# Altium PCB Audiodevice.PcbDoc (part 1 of 3)
Units mm, origin at the board's own origin, x right, y up, seen from the top; angles counter-clockwise.
Board outline 193.67 x 66.67 mm, 2 copper layers (Top Layer, Bottom Layer); 196 components, 164 nets, 795 pads, 323 vias.
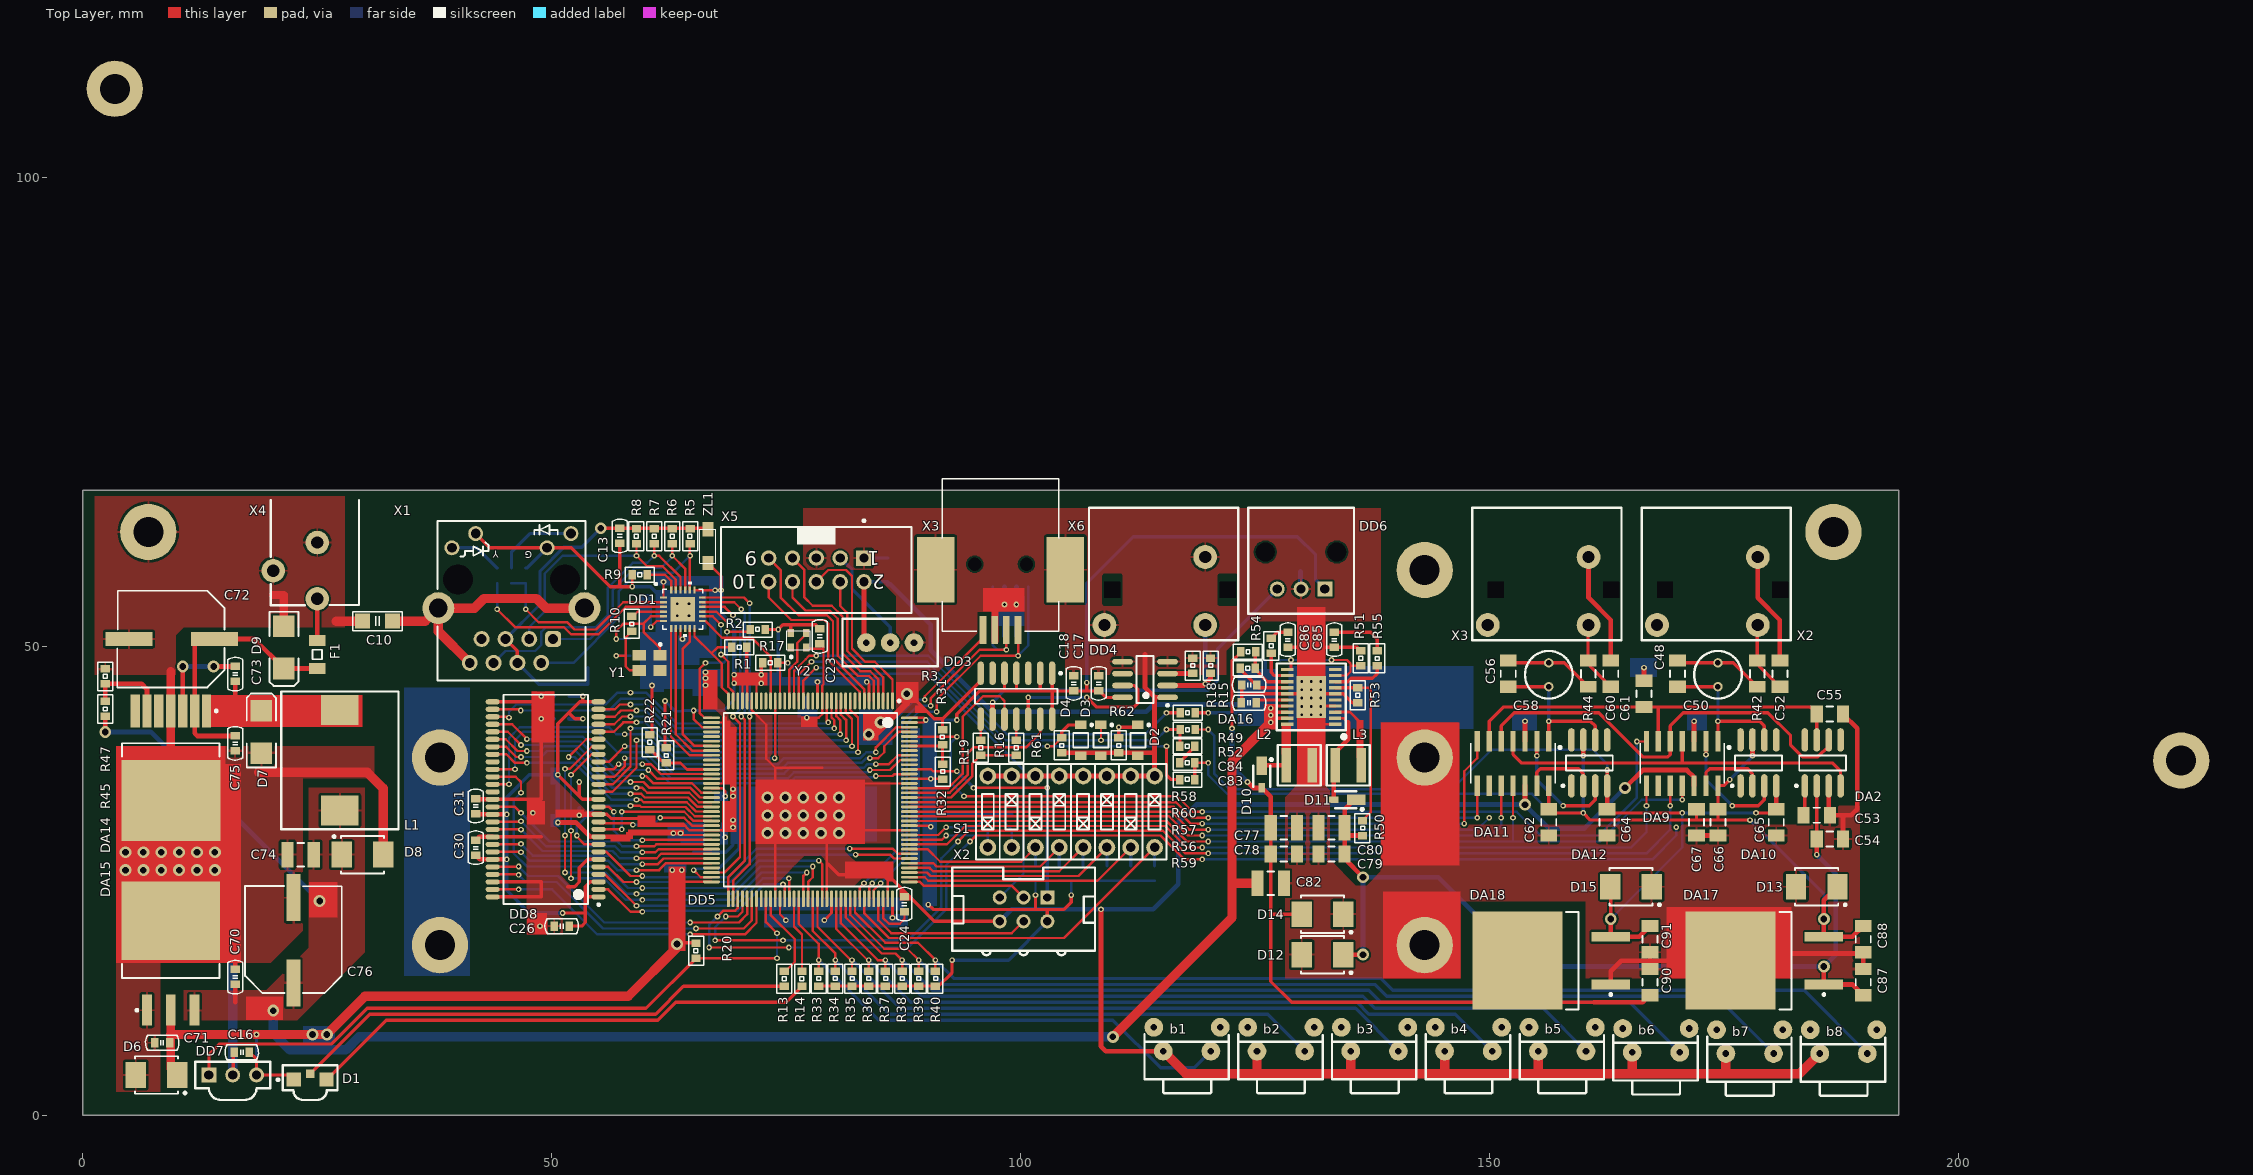
[diagram p0: Top Layer view]
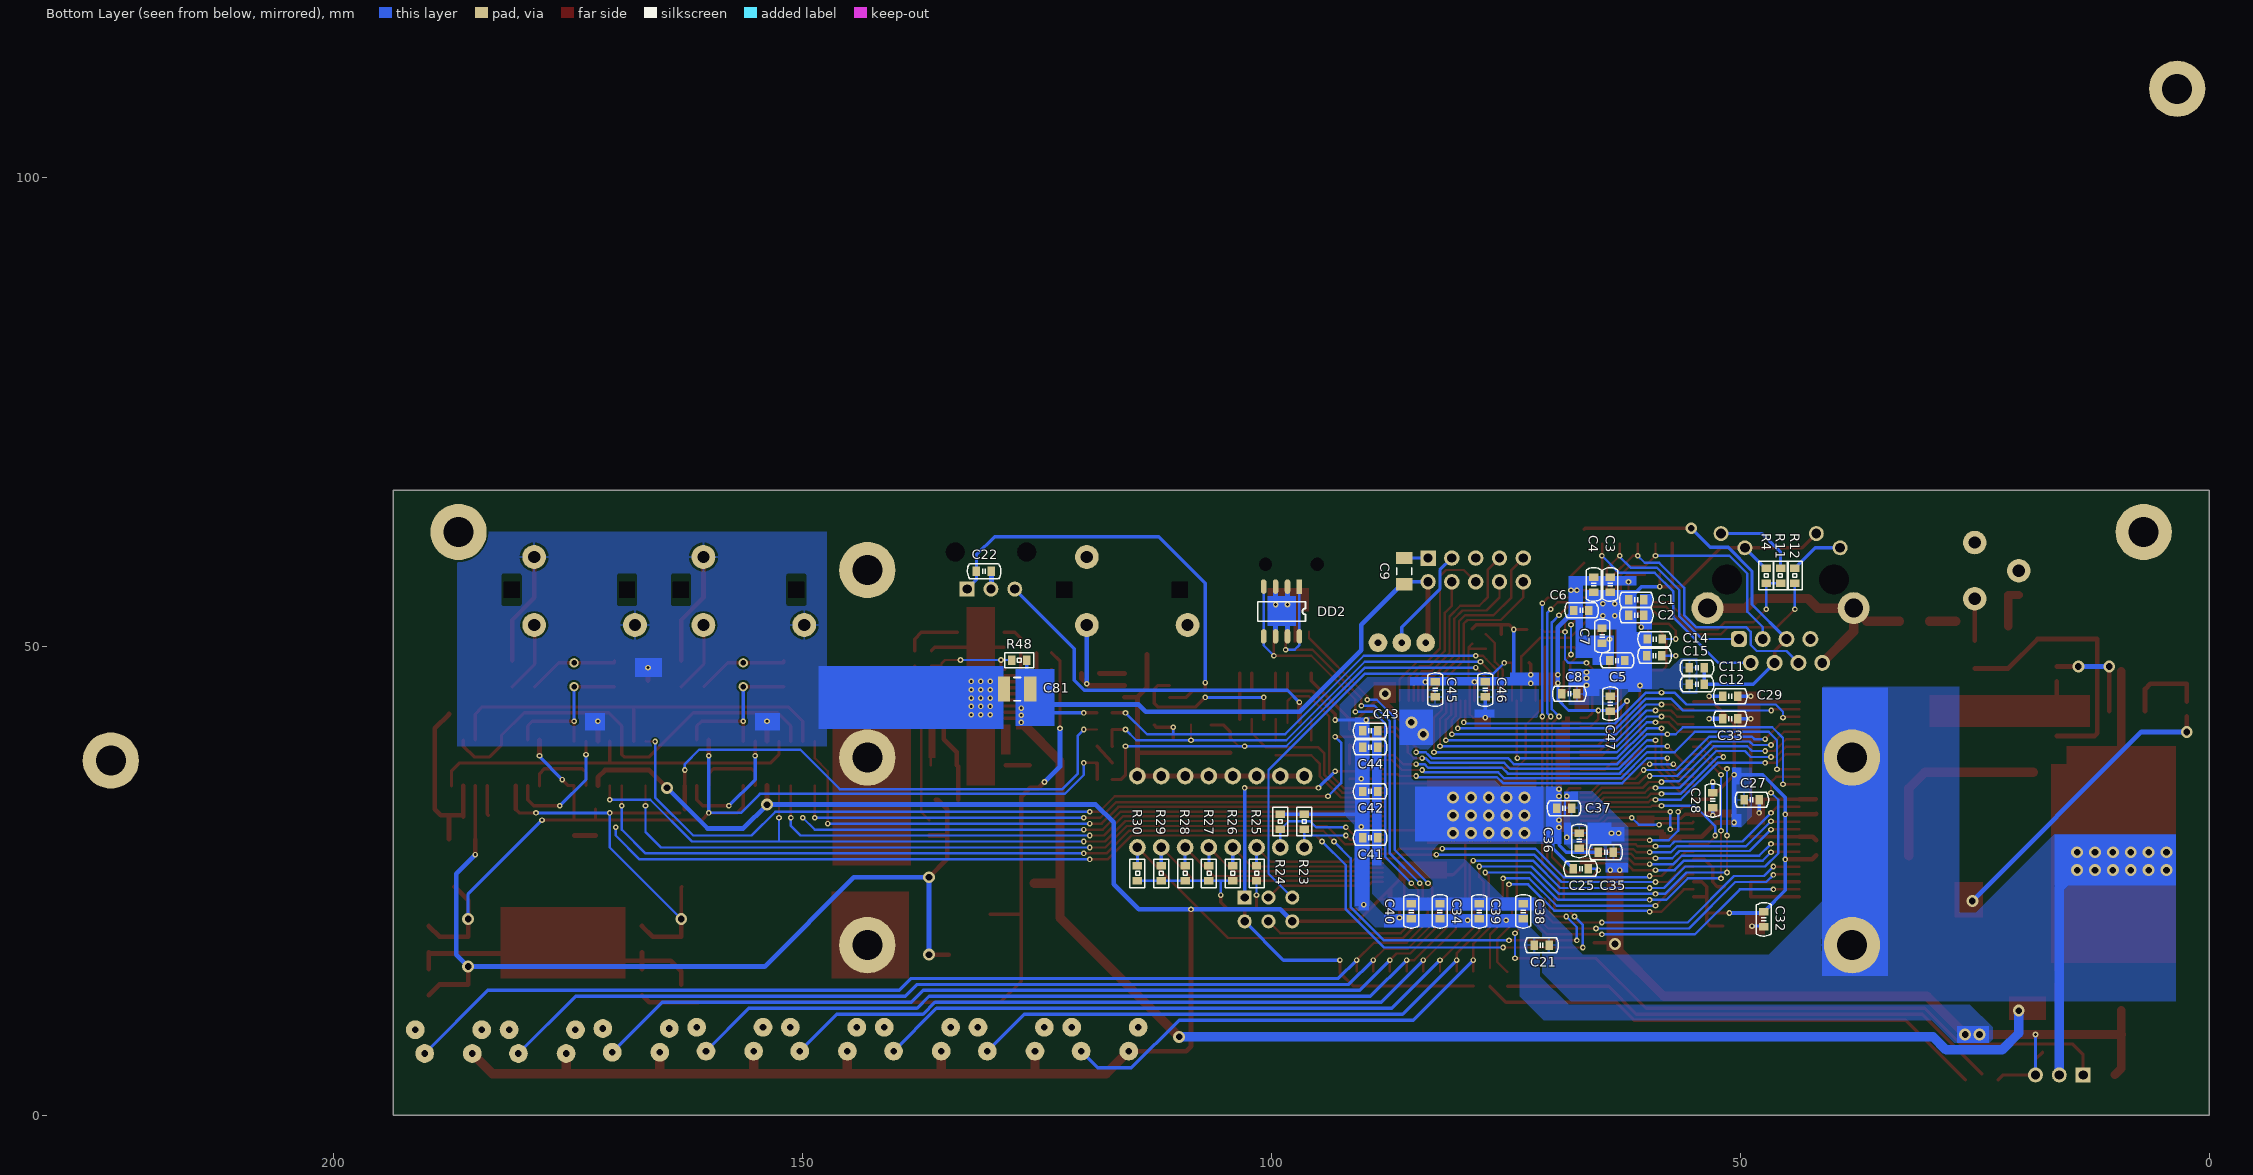
[diagram p1: Bottom Layer view, seen from below]

## Layer stack, top to bottom
Top Solder: solder mask 0.0102, Solder Resist, Dk 3.5
Top Layer: signal copper 0.0356
Dielectric 1: dielectric 0.32, FR-4, Dk 4.8
Bottom Layer: signal copper 0.0356
Bottom Solder: solder mask 0.0102, Solder Resist, Dk 3.5

## Board outline
0,0 193.675,0 193.675,66.675 0,66.675

## Design rules (kind name [scope] priority, off if disabled: settings)
Clearance [All] p1: gap=0.2 ignorepadtopadclearanceinfootprint=FALSE
HoleSize [All] p1: absolutevalues=TRUE maxlimit=4 minlimit=0.3 maxpercent=80.000 minpercent=20.000
PlaneClearance [All] p1: clearance=0.254
PolygonConnect [All] p1: connectstyle=Relief reliefconductorwidth=0.254 reliefentries=4 polygonreliefangle="90 Angle" airgapwidth=0.254
RoutingVias [All] p1: holewidth=0.3 width=0.6 viastyle="Through Hole" minholewidth=0.3 minwidth=0.6 maxholewidth=1.27 maxwidth=2.54
SolderMaskExpansion [All] p1: expansion=0.102
Width [All] p1: maxlimit=2 minlimit=0.254 preferedwidth=0.35
28 further rules are at their usual default settings.

## Classes and differential pairs
component class Power_supply: C70 C71 C72 C73 C74 C75 C76 C77 C78 C79 C80 C81 C82 C83 C84 C85 C86 C87 C88 C90 C91 D6 D7 D8 D9 D10 D11 D12 D13 D14 D15 DA14 DA15 DA16 DA17 DA18 F1 L1 L2 L3 R45 R47 R48 R49 R50 R51 R52 R53 R54 R55 R56 R57 R58 R59 R60 R61 R62 U14 U15 U17 U18 X4
component class DACs: C48 C50 C52 C53 C54 C55 C56 C58 C60 C61 C62 C64 C65 C66 C67 DA2 DA9 DA10 DA11 DA12 R42 R44 U11 X2 X3
component class Controller: b1 b2 b3 b4 b5 b6 b7 b8 C1 C2 C3 C4 C5 C6 C7 C8 C9 C10 C11 C12 C13 C14 C15 C16 C17 C18 C21 C22 C23 C24 C25 C26 C27 C28 C29 C30 C31 C32 C33 C34 C35 C36 C37 C38 C39 C40 C41 C42 C43 C44 C45 C46 C47 D1 D2 D3 D4 DD1 DD2 DD3 DD4 DD5 DD6 DD7 DD8 R1 R2 R3 R4 R5 R6 R7 R8 R9 R10 R11 R12 R13 R14 R15 R16 R17 R18 R19 R20 R21 R22 R23 R24 R25 R26 R27 R28 R29 R30 R31 R32 R33 R34 R35 R36 R37 R38 R39 R40 S1 U1B U4 X1 X2 X3 X5 X6 Y1 Y2 ZL1

## Components (designator, comment, footprint, x,y, rotation, side; value= is the part's Value field where it differs from the comment)
b1 "button" button_r 115.225,6.858 r0 top
b2 "button" button_r 125.225,6.858 r0 top
b3 "button" button_r 135.225,6.858 r0 top
b4 "button" button_r 145.225,6.858 r0 top
b5 "button" button_r 155.225,6.858 r0 top
b6 "button" button_r 165.225,6.731 r0 top
b7 "button" button_r 175.225,6.604 r0 top
b8 "button" button_r 185.225,6.604 r0 top
C1 "1uF/50V" "CAPACITOR 0603" 61.913,54.991 r180 bottom
C2 "0.01uF/50V" "CAPACITOR 0603" 61.913,53.34 r180 bottom
C3 "0.1uF/50V" "CAPACITOR 0603" 63.869,55.804 r90 bottom
C4 "0.1uF/50V" "CAPACITOR 0603" 65.647,55.804 r90 bottom
C5 "10uF/10V" "CAPACITOR 0603" 62.345,48.514 r0 bottom
C6 "0.1uF/50V" "CAPACITOR 0603" 67.755,53.848 r180 bottom
C7 "0.1uF/50V" "CAPACITOR 0603" 64.758,51.943 r270 bottom
C8 "10uF/10V" "CAPACITOR 0603" 67.437,44.958 r0 bottom
C9 "Value" C_1206 85.852,58.039 r270 bottom
C10 "1nF/2kV" "CAPACITOR 1206" 29.845,52.705 r0 top
C11 "0.1uF/50V" "CAPACITOR 0603" 55.448,47.752 r180 bottom
C12 "0.1uF/50V" "CAPACITOR 0603" 55.448,45.974 r180 bottom
C13 "0.1uF/50V" "CAPACITOR 0603" 57.277,62.611 r270 top
C14 "18pF/25V" "CAPACITOR 0603" 58.344,50.8 r0 bottom
C15 "18pF/25V" "CAPACITOR 0603" 59.974,49.022 r180 bottom
C16 "0.1uF/50V" "CAPACITOR 0603" 17.78,6.731 r180 top
C17 "0.1uF/50V" "CAPACITOR 0603" 108.331,45.263 r90 top
C18 "0.1uF/50V" "CAPACITOR 0603" 105.664,45.263 r90 top
C21 "0.1uF/50V" "CAPACITOR 0603" 72.009,18.161 r180 bottom
C22 "0.1uF/50V" "CAPACITOR 0603" 131.47,58.039 r180 bottom
C23 "0.1uF/50V" "CAPACITOR 0603" 78.613,51.892 r270 top
C24 "2.2uF/10V" "CAPACITOR 0603" 87.63,21.717 r90 top
C25 "2.2uF/10V" "CAPACITOR 0603" 66.218,26.289 r0 bottom
C26 "0.1uF/50V" "CAPACITOR 0603" 51.892,20.193 r180 top
C27 "0.1uF/50V" "CAPACITOR 0603" 49.606,33.655 r180 bottom
C28 "0.1uF/50V" "CAPACITOR 0603" 52.959,34.417 r270 bottom
C29 "0.1uF/50V" "CAPACITOR 0603" 51.892,44.704 r180 bottom
C30 "0.1uF/50V" "CAPACITOR 0603" 41.91,27.737 r90 top
C31 "0.1uF/50V" "CAPACITOR 0603" 41.91,32.182 r90 top
C32 "0.1uF/50V" "CAPACITOR 0603" 47.498,21.717 r270 bottom
C33 "0.1uF/50V" "CAPACITOR 0603" 51.892,42.291 r180 bottom
C34 "10uF/10V" "CAPACITOR 0603" 82.042,20.955 r90 bottom
C35 "0.1uF/50V" "CAPACITOR 0603" 63.551,28.067 r0 bottom
C36 "0.1uF/50V" "CAPACITOR 0603" 67.183,30.099 r270 bottom
C37 "0.1uF/50V" "CAPACITOR 0603" 67.996,32.766 r0 bottom
C38 "0.1uF/50V" "CAPACITOR 0603" 73.152,20.955 r90 bottom
C39 "0.1uF/50V" "CAPACITOR 0603" 77.851,20.955 r90 bottom
C40 "0.1uF/50V" "CAPACITOR 0603" 85.09,20.955 r90 bottom
C41 "0.1uF/50V" "CAPACITOR 0603" 90.297,29.591 r180 bottom
C42 "0.1uF/50V" "CAPACITOR 0603" 90.297,34.544 r180 bottom
C43 "0.1uF/50V" "CAPACITOR 0603" 90.297,41.021 r180 bottom
C44 "0.1uF/50V" "CAPACITOR 0603" 90.297,39.243 r180 bottom
C45 "0.1uF/50V" "CAPACITOR 0603" 82.55,46.228 r270 bottom
C46 "0.1uF/50V" "CAPACITOR 0603" 77.216,46.228 r270 bottom
C47 "0.1uF/50V" "CAPACITOR 0603" 63.881,43.104 r90 bottom
C48 "Value" C_1206 170.053,47.117 r90 top
C50 "Cap_film" Al_cap_d=5,_l_s=2.54 174.371,46.99 r90 top
C52 "Value" C_1206 180.975,47.117 r90 top
C53 "Value" C_1206 184.912,32.004 r0 top
C54 "Value" C_1206 186.309,29.464 r0 top
C55 "Value" C_1206 186.306,42.799 r0 top
C56 "Value" C_1206 152.019,47.117 r90 top
C58 "Cap_film" Al_cap_d=5,_l_s=2.54 156.337,46.99 r90 top
C60 "Value" C_1206 162.941,47.117 r90 top
C61 "Value" C_1206 166.497,44.958 r90 top
C62 "Value" C_1206 156.337,31.242 r270 top
C64 "Value" C_1206 162.56,31.242 r270 top
C65 "Value" C_1206 180.594,31.242 r270 top
C66 "Value" C_1206 174.371,31.242 r270 top
C67 "Value" C_1206 172.085,31.242 r270 top
C70 "2.2uF/50V" "CAPACITOR 0603" 16.256,15.57 r270 top
C71 "2.2uF/50V" "CAPACITOR 0603" 7.671,7.747 r0 top
C72 "220uF" CapacitorG 9.503,50.8 r0 top
C73 "0.01uF/50V" "CAPACITOR 0603" 16.256,47.879 r270 top
C74 "Value" C_1210 23.241,27.813 r0 top
C75 "0.1uF/50V" "CAPACITOR 0603" 16.256,38.862 r90 top
C76 "220uF" CapacitorG 22.479,18.669 r270 top
C77 "Value" C_1210 128.087,30.663 r180 top
C78 "Value" C_1206 128.087,27.869 r0 top
C79 "Value" C_1206 133.167,27.869 r180 top
C80 "Value" C_1210 133.167,30.663 r0 top
C81 "Value" C_1210 127.127,45.466 r180 bottom
C82 "Value" C_1210 126.687,24.765 r180 top
C83 "2.2uF/50V" "CAPACITOR 0603" 123.566,43.998 r0 top
C84 "2.2uF/50V" "CAPACITOR 0603" 125.196,45.903 r180 top
C85 "47nF/50V" "CAPACITOR 0603" 133.477,49.911 r90 top
C86 "47nF/50V" "CAPACITOR 0603" 128.524,49.911 r90 top
C87 "Value" C_1206 189.865,14.224 r90 top
C88 "Value" C_1206 189.865,18.796 r270 top
C90 "Value" C_1206 167.132,14.224 r90 top
C91 "Value" C_1206 167.132,18.796 r270 top
D1 "LED APBA3010SURKCGKC-GX" LED_RG_APBA3010SURKCGKC-GX 24.257,3.81 r180 top
D2 "MMSZ4679T1G" ONSC-SOD-123-2-425-04_V 112.522,40.005 r270 top
D3 "MMSZ4679T1G" ONSC-SOD-123-2-425-04_V 108.585,40.005 r270 top
D4 "MMSZ4679T1G" ONSC-SOD-123-2-425-04_V 106.426,40.005 r270 top
D6 "SMLVT3V3" ONSC-SMB-2-403A-03_H_V 7.874,4.318 r180 top
D7 "10BQ060" SMB 19.05,40.894 r90 top
D8 "SMBJ5.0CA-13-F" ONSC-SMB-2-403A-03_H_V 29.845,27.813 r0 top
D9 "10BQ060" SMB 21.463,49.911 r270 top
D10 "DFLS240" "PowerDI™ 123" 125.73,36.449 r90 top
D11 "DFLS240" "PowerDI™ 123" 134.945,33.66 r0 top
D12 "SMBJ12CA-13-F" ONSC-SMB-2-403A-03_H_V 132.207,17.145 r180 top
D13 "SMBJ5.0CA-13-F" ONSC-SMB-2-403A-03_H_V 184.909,24.384 r180 top
D14 "SMBJ12CA-13-F" ONSC-SMB-2-403A-03_H_V 132.207,21.463 r180 top
D15 "SMBJ5.0CA-13-F" ONSC-SMB-2-403A-03_H_V 165.1,24.384 r180 top
DA2 "MAX6126" ADI-R-8_M 185.547,37.592 r90 top
DA9 "MAX5719" D14 170.561,37.541 r270 top
DA10 "OPA1611AID" TI-D8_M 178.689,37.592 r90 top
DA11 "MAX5719" D14 152.527,37.541 r270 top
DA12 "OPA1611AID" TI-D8_M 160.655,37.592 r90 top
DA14 "LM2676SX-ADJ" TS7B_M 9.398,37.084 r270 top
DA15 "LM1117SX-3.3" TS3B_N 9.398,17.272 r90 top
DA16 "ADP5071AREZ" 20-TSSOP_exposed_pad 131.008,44.633 r180 top
DA17 "L7805ABD2T-TR" TO-263_M 179.324,16.51 r180 top
DA18 "L7905CD2T-TR" TO-263_M 156.591,16.51 r180 top
DD1 "Part Number: LAN8720A-CP-TR" QFN24-6X6_MC-M 63.996,53.975 r0 top value=Value
DD2 "LC03-3.3" SOIC-8 97.028,56.388 r270 bottom
DD3 "MC74VHC126D" 751A-03_M 99.568,44.704 r270 top
DD4 "DS90LV028ATM" M08A_N 113.284,46.482 r180 top
DD5 "STM32H743" STM-LQFP144_N 77.606,33.651 r270 top
DD6 "PLR135-T" PLR135-T 129.921,56.134 r0 top
DD7 "TSOP38538" TSOP38538 16.002,4.318 r0 top
DD8 "MT48LC4M16A2P-6 IT OR IS42S16400J" MICT-P-54_N 49.366,33.706 r180 top
F1 "Fuse" R_1206#1 25.019,49.149 r270 top
L1 "SRP1265A-330MCT-ND" Inductor_RLF12545 27.432,43.212 r270 top
L2 "Wurth 74438357068" Wurth74438357068 129.738,37.343 r180 top
L3 "Wurth 74438357068" Wurth74438357068 134.945,37.343 r0 top
R1 "1K5" "Resistor 0603" 69.215,49.911 r0 top
R2 "10K" "Resistor 0603" 71.171,51.816 r0 top
R3 "10K" r3296 88.646,50.419 r90 top
R4 "10K" "Resistor 0603" 47.244,56.769 r90 bottom
R5 "49R9 1%" "Resistor 0603" 64.77,60.96 r90 top
R6 "49R9 1%" "Resistor 0603" 62.865,60.96 r90 top
R7 "49R9 1%" "Resistor 0603" 60.96,60.96 r90 top
R8 "49R9 1%" "Resistor 0603" 59.055,60.96 r90 top
R9 "12K1 1%" "Resistor 0603" 58.598,57.658 r0 top
R10 "499R" "Resistor 0603" 58.547,51.613 r90 top
R11 "270R" "Resistor 0603" 45.72,56.769 r90 bottom
R12 "270R" "Resistor 0603" 44.196,56.769 r90 bottom
R13 "330" "Resistor 0603" 74.803,13.767 r90 top
R14 "330" "Resistor 0603" 76.708,13.767 r90 top
R15 "75" "Resistor 0603" 120.269,48.768 r270 top
R16 "330" "Resistor 0603" 99.568,38.405 r90 top
R17 "10K" "Resistor 0603" 74.117,48.26 r180 top
R18 "75" "Resistor 0603" 118.364,48.768 r270 top
R19 "330" "Resistor 0603" 95.758,38.405 r90 top
R20 "4.7K" "Resistor 0603" 65.405,16.764 r90 top
R21 "4.7K" "Resistor 0603" 62.23,37.592 r90 top
R22 "4.7K" "Resistor 0603" 60.452,40.589 r270 top
R23 "4.7K" "Resistor 0603" 96.52,30.531 r90 bottom
R24 "4.7K" "Resistor 0603" 99.06,30.531 r90 bottom
R25 "4.7K" "Resistor 0603" 101.6,26.619 r270 bottom
R26 "4.7K" "Resistor 0603" 104.14,26.619 r270 bottom
R27 "4.7K" "Resistor 0603" 106.68,26.619 r270 bottom
R28 "4.7K" "Resistor 0603" 109.22,26.619 r270 bottom
R29 "4.7K" "Resistor 0603" 111.76,26.619 r270 bottom
R30 "4.7K" "Resistor 0603" 114.3,26.619 r270 bottom
R31 "4.7K" "Resistor 0603" 91.694,39.548 r90 top
R32 "4.7K" "Resistor 0603" 91.694,37.465 r270 top
R33 "4.7K" "Resistor 0603" 78.486,15.392 r270 top
R34 "4.7K" "Resistor 0603" 80.264,15.392 r270 top
R35 "4.7K" "Resistor 0603" 82.042,15.392 r270 top
R36 "4.7K" "Resistor 0603" 83.82,15.392 r270 top
R37 "4.7K" "Resistor 0603" 85.598,15.392 r270 top
R38 "4.7K" "Resistor 0603" 87.376,15.392 r270 top
R39 "4.7K" "Resistor 0603" 89.154,15.392 r270 top
R40 "4.7K" "Resistor 0603" 90.932,15.392 r270 top
R42 "Value" R_1206#2 178.562,47.117 r90 top
R44 "Value" R_1206#2 160.528,47.117 r90 top
R45 "4.7K" "Resistor 0603" 2.413,44.145 r270 top
R47 "1K5" "Resistor 0603" 2.413,47.625 r270 top
R48 "5K6" "Resistor 0603" 127.706,48.519 r180 bottom
R49 "11K" "Resistor 0603" 125.064,49.459 r180 top
R50 "10K" "Resistor 0603" 136.469,31.45 r270 top
R51 "2K" "Resistor 0603" 136.271,49.555 r270 top
R52 "1K" "Resistor 0603" 123.439,47.681 r0 top
R53 "1K1" "Resistor 0603" 135.961,43.998 r90 top
R54 "11K" "Resistor 0603" 126.746,50.876 r270 top
R55 "5K6" "Resistor 0603" 138.049,47.93 r90 top
R56 "1.5K 0.1%" "Resistor 0603" 116.993,37.592 r0 top
R57 "1.5K 0.1%" "Resistor 0603" 116.993,39.37 r0 top
R58 "4.7K" "Resistor 0603" 117.018,42.926 r0 top
R59 "4.7K" "Resistor 0603" 116.993,35.814 r0 top
R60 "4.7K" "Resistor 0603" 118.618,41.148 r180 top
R61 "1.5K 0.1%" "Resistor 0603" 104.394,38.659 r90 top
R62 "1.5K 0.1%" "Resistor 0603" 110.49,38.659 r90 top
S1 "SW-DIP16" SW-DIP16 96.52,28.575 r0 top
X1 "J00-0065NL" J00-0065NL 53.51,54.1 r270 top
X2 "PJRAS1X1S01X" RCA_connector 174.879,58.547 r180 top
X2 "Header 3x2" idc6 102.87,23.241 r270 top
X3 "PJRAS1X1S01X" RCA_connector 156.829,58.547 r180 top
X3 "1734346-1" CONN_1-1734346-1 97.879,55.27 r0 top value=Value
X4 "PJ102a" Conn_pj-102a 25.019,55.087 r0 top
X5 "16*2 LCD OR SPI_4" BH-10 78.232,58.166 r180 top
X6 "PJRAS1X1S01X" RCA_connector 115.951,58.547 r180 top
Y1 "ABM8-25.000MHZ-B2-T" CFPX-5 60.452,48.26 r180 top
Y2 "KC2520B16.3840C1GE00" "Clock Oscillator ASDMB" 76.327,50.673 r0 top
ZL1 "BLM31PG121SN1L" BLM31 66.675,60.706 r90 top

## Footprints (in the part's own frame and the unit in brackets; to place one, negate y for a bottom-side part, rotate by r counter-clockwise, add the part's x,y. Pads: shape width x height; smd on the part's side, far side on the other; paste and mask are expansions set on the pad)
20-TSSOP_exposed_pad [mm]
  rect 1.3x0.35 smd: 1(-2.55,2.925) 2(-2.54,2.275) 3(-2.55,1.625) 4(-2.55,0.975) 5(-2.55,0.325) 6(-2.55,-0.325) 7(-2.55,-0.975) 8(-2.55,-1.625) 9(-2.55,-2.275) 10(-2.55,-2.925) 11(2.55,-2.925) 12(2.55,-2.275) 13(2.55,-1.625) 14(2.55,-0.975) 15(2.55,-0.325) 16(2.565,0.325) 17(2.565,0.975) 18(2.565,1.625) 19(2.565,2.275) 20(2.565,2.925)
  rect 3.1x4.5 smd: 21(0,0)
  silkscreen extent -3.68,-3.56 3.68,4.44
751A-03_M [mm] "SOIC, 14-Leads, Body 8.7x3.9mm, Pitch 1.27mm, IPC Low Density"
  oval 2.5x0.7 smd: 1(-2.45,3.81) 2(-2.45,2.54) 3(-2.45,1.27) 4(-2.45,0) 5(-2.45,-1.27) 6(-2.45,-2.54) 7(-2.45,-3.81) 8(2.45,-3.81) 9(2.45,-2.54) 10(2.45,-1.27) 11(2.45,0) 12(2.45,1.27) 13(2.45,2.54) 14(2.45,3.81)
  silkscreen extent -2.57,-4.4 0.8,4.84, body extent -2,-4.38 2,4.38, height 1.75
ADI-R-8_M [mm] "SOIC, 8-Leads, Body 4.9x3.9mm, Pitch 1.27mm, IPC Low Density"
  oval 2.5x0.7 smd: 1(-2.45,1.905) 2(-2.45,0.635) 3(-2.45,-0.635) 4(-2.45,-1.905) 5(2.45,-1.905) 6(2.45,-0.635) 7(2.45,0.635) 8(2.45,1.905)
  silkscreen extent -2.57,-2.5 0.8,2.93, body extent -2,-2.5 2,2.5, height 1.75
Al_cap_d=5,_l_s=2.54 [mm]
  round 1 hole 0.6: 1(-1.27,0) 2(1.27,0)
  silkscreen extent -2.54,-2.54 2.54,2.54
BH-10 [mm] "Connector; IDC, Low Profile Male Header, Thru-Hole; 10 Position; Vertical; Pitch 2.54 mm; Body 20.32 x 9.2 x 9.45 mm (LxWxH)"
  rect 1.65x1.65 hole 1: 1(-5.08,-1.27)
  round 1.65 hole 1: 2(-5.08,1.27) 3(-2.54,-1.27) 4(-2.54,1.27) 5(0,-1.27) 6(0,1.27) 7(2.54,-1.27) 8(2.54,1.27) 9(5.08,-1.27) 10(5.08,1.27)
  silkscreen extent -10.16,-5.37 10.16,4.6
BLM31 [mm]
  rect 1.5x1.2 smd: 1(-1.8,0) 2(1.8,0)
  silkscreen extent -1.8,-0.85 1.8,0.85
button_r [mm] "Pushbutton frontal"
  round 2 hole 0.7: 1(0,0) 2(5.08,0) 3(-1,2.54) 4(6.08,2.54)
  silkscreen extent -2,-4.5 7,1.8
C_1206 [mm] "C_1206"
  rect 1.3x1.8 smd: 1(-1.4,0) 2(1.4,0)
  silkscreen extent -0.35,-0.8 0.35,0.8, body extent -1.6,-0.8 1.6,0.8, height 0.78
C_1210 [mm] "C_1210"
  rect 1.3x2.7 smd: 1(-1.4,0) 2(1.4,0)
  silkscreen extent -0.35,-1.25 0.35,1.25, body extent -1.6,-1.25 1.6,1.25, height 0.78
"CAPACITOR 0603" [mm]
  rect 0.8x1 smd: 1(0,0) 2(1.6,0)
  silkscreen extent -0.97,-0.8 2.6,0.8, body extent -0.01,-0.38 1.64,0.42, height 0.81
"CAPACITOR 1206" [mm]
  rect 1.6x1.6 smd: 1(0,0) 2(3.2,0)
  silkscreen extent -1.02,-1.02 4.23,1.02, body extent 0.01,-0.8 3.22,0.8, height 1.26
CapacitorG [mm] "Aluminium cap, smt, d10mm"
  rect 5x1.5 smd: 1(-4.55,0) 2(4.55,0)
  silkscreen extent -5.82,-5.15 5.61,5.15, body extent -5.73,-5.07 5.58,5.23, height 10.8
CFPX-5 [mm] "Surface Mount Quartz Crystal; Body 3.4 x 2.7 mm (LxW max)"
  rect 1.4x1.15 smd: 1(-1.1,-0.8) 2(1.1,-0.8) 3(1.1,0.8) 4(-1.1,0.8)
  silkscreen extent -1.27,-2.09 -1.03,-1.84
"Clock Oscillator ASDMB" [mm] "Clock Oscillator ASDMB 2.5x2.0"
  rect 0.7x0.85 smd mask+0.051: 1(-0.825,-0.775) 2(0.825,-0.775) 3(0.825,0.775) 4(-0.825,0.775)
  silkscreen extent -1.25,-1 1.25,1
CONN_1-1734346-1 [mil]
  rect 28x118 smd: 1(-73.5,-138) 2(24.5,-138) 3(73.5,-138) 4(-24.5,-138)
  rect 157.48x275.59 smd: 5(-272.5,115) 6(272.5,115)
  round 0 hole 55.12 unplated: 7(-108.5,138) 8(108.5,138)
  silkscreen extent -244,-143 244,497, body extent -326,-180 324,494, height 445
Conn_pj-102a [mm] "Cui inc, PJ-102A Barell jack"
  round 2.5 hole 1.3: 1(0,0) 2(0,6) 3(-4.7,3)
  silkscreen extent -4.95,-0.69 4.44,10.54, body extent -4.95,-0.69 4.45,13.71, height 11.01
D14 [mil]
  rect 86x22 smd paste+0 mask+0: 1(-93,150) 2(-93,100) 3(-93,50) 4(-93,0) 5(-93,-50) 6(-93,-100) 7(-93,-150) 8(93,-150) 9(93,-100) 10(93,-50) 11(93,0) 12(93,50) 13(93,100) 14(93,150)
  silkscreen extent -84,-177 84,203, body extent -122,-172 122,172, height 69
idc6 [mm]
  rect 1.5x1.5 hole 0.9: 1(0,0)
  round 1.5 hole 0.9: 2(2.54,0) 3(0,-2.54) 4(2.54,-2.54) 5(0,-5.08) 6(2.54,-5.08)
  silkscreen extent -3.2,-10.16 6.15,5.08, body extent -3.18,-10.16 6.27,5.08, height 9.11
Inductor_RLF12545 [mm]
  rect 3.2x4 smd: 1(0,0) 2(10.7,0)
  silkscreen extent -2,-6.25 12.7,6.25
J00-0065NL [mm]
  rrect50% 1.7x1.7 hole 1.05: 1(3.3,-3.345)
  round 1.7 hole 1.05: 2(5.84,-4.615) 3(3.3,-5.885) 4(5.84,-7.155) 5(3.3,-8.425) 6(5.84,-9.695) 7(3.3,-10.965) 8(5.84,-12.235)
  round 1.6 hole 1.05: 9(-7.95,-1.44) 10(-6.43,-3.98) 11(-7.95,-11.6) 12(-6.43,-14.14)
  round 3.4 hole 2: 13(0,0) 14(0,-15.58)
  round 2.95 hole 3.2: MH3(-3.05,-2.075) MH4(-3.05,-13.505)
  silkscreen extent -9.3,-15.68 7.71,0.09, body extent -13.76,-18.49 7.82,2.89, height 15.75
LED_RG_APBA3010SURKCGKC-GX [mm]
  rect 1.5x1.5 smd: 1(1.75,0) 3(-1.75,0)
  rect 0.9x0.9 smd: 2(0,-0.65)
  silkscreen extent -2.92,-1.52 3.56,2.16
M08A_N [mm] "SOIC, 8-Leads, Body 4.9x3.9mm, Pitch 1.27mm, IPC Medium Density"
  oval 2.2x0.6 smd: 1(-2.4,1.905) 2(-2.4,0.635) 3(-2.4,-0.635) 4(-2.4,-1.905) 5(2.4,-1.905) 6(2.4,-0.635) 7(2.4,0.635) 8(2.4,1.905)
  silkscreen extent -2.53,-2.5 0.9,2.88, body extent -2,-2.5 2,2.5, height 1.75
MICT-P-54_N [mm] "SOP, 54-Leads, Body 22.3x10.2mm, Pitch 0.8mm, IPC Medium Density"
  oval 1.5x0.55 smd: 1(-5.65,10.4) 2(-5.65,9.6) 3(-5.65,8.8) 4(-5.65,8) 5(-5.65,7.2) 6(-5.65,6.4) 7(-5.65,5.6) 8(-5.65,4.8) 9(-5.65,4) 10(-5.65,3.2) 11(-5.65,2.4) 12(-5.65,1.6) 13(-5.65,0.8) 14(-5.65,0) 15(-5.65,-0.8) 16(-5.65,-1.6) 17(-5.65,-2.4) 18(-5.65,-3.2) 19(-5.65,-4) 20(-5.65,-4.8) 21(-5.65,-5.6) 22(-5.65,-6.4) 23(-5.65,-7.2) 24(-5.65,-8) 25(-5.65,-8.8) 26(-5.65,-9.6) 27(-5.65,-10.4) 28(5.65,-10.4) 29(5.65,-9.6) 30(5.65,-8.8) 31(5.65,-8) 32(5.65,-7.2) 33(5.65,-6.4) 34(5.65,-5.6) 35(5.65,-4.8) 36(5.65,-4) 37(5.65,-3.2) 38(5.65,-2.4) 39(5.65,-1.6) 40(5.65,-0.8) 41(5.65,0) 42(5.65,0.8) 43(5.65,1.6) 44(5.65,2.4) 45(5.65,3.2) 46(5.65,4) 47(5.65,4.8) 48(5.65,5.6) 49(5.65,6.4) 50(5.65,7.2) 51(5.65,8) 52(5.65,8.8) 53(5.65,9.6) 54(5.65,10.4)
  silkscreen extent -5.77,-11.15 4.5,11.35, body extent -5.1,-11.15 5.1,11.15, height 1.2
ONSC-SMB-2-403A-03_H_V [mm] "Molded, 2-Leads, Body 4.6x3.95mm"
  rect 2.159x2.743 smd: 1(-2.21,0) 2(2.21,0)
  silkscreen extent -3.16,-2 2.3,2.05, body extent -2.3,-1.97 2.3,1.97, height 2.42
ONSC-SOD-123-2-425-04_V [mm] "SOD, 2-Leads, Body 2.69x1.6mm"
  rect 0.91x1.22 smd: 1(-1.635,0) 2(1.635,0)
  silkscreen extent -1.76,-0.8 0.78,1.29, body extent -1.35,-0.8 1.35,0.8, height 1.35
PLR135-T [mm]
  rect 1.6x1.6 hole 1: 1(2.54,0)
  round 1.6 hole 1: 2(0,0) 3(-2.54,0)
  round 1.6 hole 2 slot 2.01 at 0 deg unplated: Mount(-3.81,3.95) Mount(3.81,3.95)
  silkscreen extent -5.65,-2.65 5.65,8.65
"PowerDI™ 123" [mm]
  rect 1x0.65 smd: 1(-1.525,0)
  rect 2x1.1 smd: 2(0.85,0)
  silkscreen extent -1.4,-1.16 1.64,0.89
QFN24-6X6_MC-M [mil]
  rect 28x10 smd paste+0 mask+0: 1(-81,49.21) 2(-81,29.53) 3(-81,9.84) 4(-81,-9.84) 5(-81,-29.53) 6(-81,-49.21) 13(81,-49.21) 14(81,-29.53) 15(81,-9.84) 16(81,9.84) 17(81,29.53) 18(81,49.21)
  rect 10x28 smd paste+0 mask+0: 7(-49.21,-81) 8(-29.53,-81) 9(-9.84,-81) 10(9.84,-81) 11(29.53,-81) 12(49.21,-81) 19(49.21,81) 20(29.53,81) 21(9.84,81) 22(-9.84,81) 23(-29.53,81) 24(-49.21,81)
  rect 102x102 smd paste-50.5 mask+0: 25(0,0)
  silkscreen extent -117,-115 84,115
r3296 [mm]
  round 2 hole 0.7: 1(0,0) 2(0,2.54) 3(0,5.08)
  silkscreen extent -2.54,-2.54 2.54,7.62
R_1206#1 [mm]
  rect 1.15x1.8 smd: 1(-1.5,0) 2(1.5,0)
  silkscreen extent -0.51,-0.51 0.51,0.51, body extent -1.6,-0.8 1.6,0.8, height 1
R_1206#2 [mm] "R_1206"
  rect 1.25x1.75 smd: 1(-1.4,0) 2(1.4,0)
  silkscreen extent -0.4,-0.77 0.4,0.77, body extent -1.6,-0.8 1.6,0.8, height 0.6
RCA_connector [mm]
  round 2.54 hole 1.3: 1(-3.75,6.25) 2(-3.75,-1) 3(7,6.25)
  rect 0x0 hole 1.7 square: ""(-6.15,2.5) ""(6.15,2.5)
  silkscreen extent -7.26,-6.25 8.64,7.87
"Resistor 0603" [mm]
  rect 0.8x1 smd: 1(0,0) 2(1.6,0)
  silkscreen extent -0.72,-0.8 2.35,0.8, body extent -0.03,-0.45 1.63,0.45, height 0.46
SMB [mm] "DO-214-AA/SMB; 2 C-Bend Leads; Body 5.3 x 3.6 mm, inc. leads (LxW)"
  rect 2.3x2.3 smd: 1(-2.25,0) 2(2.25,0)
  silkscreen extent -3.8,-1.55 4.1,1.55
SOIC-8 [mm]
  rect 1.55x0.6 smd: 1(0,0)
  oval 1.55x0.6 smd: 2(0,-1.27) 3(0,-2.54) 4(0,-3.81) 5(5.3,-3.81) 6(5.3,-2.54) 7(5.3,-1.27) 8(5.3,0)
  silkscreen extent 1.61,-4.44 3.69,0.63
STM-LQFP144_N [mm] "Thin QFP, 144-Leads, Body 20x20mm, Pitch 0.5mm, IPC Medium Density"
  oval 1.8x0.3 smd: 1(-10.55,8.75) 2(-10.55,8.25) 3(-10.55,7.75) 4(-10.55,7.25) 5(-10.55,6.75) 6(-10.55,6.25) 7(-10.55,5.75) 8(-10.55,5.25) 9(-10.55,4.75) 10(-10.55,4.25) 11(-10.55,3.75) 12(-10.55,3.25) 13(-10.55,2.75) 14(-10.55,2.25) 15(-10.55,1.75) 16(-10.55,1.25) 17(-10.55,0.75) 18(-10.55,0.25) 19(-10.55,-0.25) 20(-10.55,-0.75) 21(-10.55,-1.25) 22(-10.55,-1.75) 23(-10.55,-2.25) 24(-10.55,-2.75) 25(-10.55,-3.25) 26(-10.55,-3.75) 27(-10.55,-4.25) 28(-10.55,-4.75) 29(-10.55,-5.25) 30(-10.55,-5.75) 31(-10.55,-6.25) 32(-10.55,-6.75) 33(-10.55,-7.25) 34(-10.55,-7.75) 35(-10.55,-8.25) 36(-10.55,-8.75) 73(10.55,-8.75) 74(10.55,-8.25) 75(10.55,-7.75) 76(10.55,-7.25) 77(10.55,-6.75) 78(10.55,-6.25) 79(10.55,-5.75) 80(10.55,-5.25) 81(10.55,-4.75) 82(10.55,-4.25) 83(10.55,-3.75) 84(10.55,-3.25) 85(10.55,-2.75) 86(10.55,-2.25) 87(10.55,-1.75) 88(10.55,-1.25) 89(10.55,-0.75) 90(10.55,-0.25) 91(10.55,0.25) 92(10.55,0.75) 93(10.55,1.25) 94(10.55,1.75) 95(10.55,2.25) 96(10.55,2.75) 97(10.55,3.25) 98(10.55,3.75) 99(10.55,4.25) 100(10.55,4.75) 101(10.55,5.25) 102(10.55,5.75) 103(10.55,6.25) 104(10.55,6.75) 105(10.55,7.25) 106(10.55,7.75) 107(10.55,8.25) 108(10.55,8.75)
  oval 0.3x1.8 smd: 37(-8.75,-10.55) 38(-8.25,-10.55) 39(-7.75,-10.55) 40(-7.25,-10.55) 41(-6.75,-10.55) 42(-6.25,-10.55) 43(-5.75,-10.55) 44(-5.25,-10.55) 45(-4.75,-10.55) 46(-4.25,-10.55) 47(-3.75,-10.55) 48(-3.25,-10.55) 49(-2.75,-10.55) 50(-2.25,-10.55) 51(-1.75,-10.55) 52(-1.25,-10.55) 53(-0.75,-10.55) 54(-0.25,-10.55) 55(0.25,-10.55) 56(0.75,-10.55) 57(1.25,-10.55) 58(1.75,-10.55) 59(2.25,-10.55) 60(2.75,-10.55) 61(3.25,-10.55) 62(3.75,-10.55) 63(4.25,-10.55) 64(4.75,-10.55) 65(5.25,-10.55) 66(5.75,-10.55) 67(6.25,-10.55) 68(6.75,-10.55) 69(7.25,-10.55) 70(7.75,-10.55) 71(8.25,-10.55) 72(8.75,-10.55) 109(8.75,10.55) 110(8.25,10.55) 111(7.75,10.55) 112(7.25,10.55) 113(6.75,10.55) 114(6.25,10.55) 115(5.75,10.55) 116(5.25,10.55) 117(4.75,10.55) 118(4.25,10.55) 119(3.75,10.55) 120(3.25,10.55) 121(2.75,10.55) 122(2.25,10.55) 123(1.75,10.55) 124(1.25,10.55) 125(0.75,10.55) 126(0.25,10.55) 127(-0.25,10.55) 128(-0.75,10.55) 129(-1.25,10.55) 130(-1.75,10.55) 131(-2.25,10.55) 132(-2.75,10.55) 133(-3.25,10.55) 134(-3.75,10.55) 135(-4.25,10.55) 136(-4.75,10.55) 137(-5.25,10.55) 138(-5.75,10.55) 139(-6.25,10.55) 140(-6.75,10.55) 141(-7.25,10.55) 142(-7.75,10.55) 143(-8.25,10.55) 144(-8.75,10.55)
  silkscreen extent -10.67,-9.25 9.25,9.58, body extent -10,-10 10,10, height 1.6
SW-DIP16 [mil]
  round 70 hole 40: 1(0,0) 2(100,0) 3(200,0) 4(300,0) 5(400,0) 6(500,0) 7(600,0) 8(700,0) 9(700,300) 10(600,300) 11(500,300) 12(400,300) 13(300,300) 14(200,300) 15(100,300) 16(0,300)
  silkscreen extent -50,-50 750,350, body extent -50,-50 750,350, height 250
TI-D8_M [mm] "SOIC, 8-Leads, Body 4.9x3.9mm, Pitch 1.27mm, IPC Low Density"
  oval 2.5x0.7 smd: 1(-2.45,1.905) 2(-2.45,0.635) 3(-2.45,-0.635) 4(-2.45,-1.905) 5(2.45,-1.905) 6(2.45,-0.635) 7(2.45,0.635) 8(2.45,1.905)
  silkscreen extent -2.57,-2.5 0.8,2.93, body extent -2,-2.5 2,2.5, height 1.75
TO-263_M [mm] "D2-PAK, 4-Leads, Body 9.2x10.2mm, Pitch 2.54mm, Lead Span 15.4mm, IPC Low Density"
  rect 4.1x1.05 smd: 1(-6.35,2.54) 3(-6.35,-2.54)
  rect 9.6x10.45 smd: 4(3.6,0)
  silkscreen extent -6.48,-5.2 -1.6,5.2, body extent -2.9,-5.2 6.45,5.2, height 4.6
TS3B_N [mm] "D2-PAK, 4-Leads, Body 8.6x10.2mm, Pitch 2.54mm, Lead Span 14.2mm, IPC Medium Density"
  rect 3.3x1.05 smd: 1(-6.05,2.54) 2(-6.05,0) 3(-6.05,-2.54)
  rect 8.4x10.5 smd: 4(3.5,0)
  silkscreen extent -6.17,-5.2 -1.1,5.2, body extent -2.6,-5.2 6.29,5.2, height 4.64
TS7B_M [mm] "D2-PAK, 8-Leads, Body 8.6x10.2mm, Pitch 1.27mm, Lead Span 14.1mm, IPC Low Density"
  rect 3.5x1 smd: 1(-6.05,3.81) 2(-6.05,2.54) 3(-6.05,1.27) 4(-6.05,0) 5(-6.05,-1.27) 6(-6.05,-2.54) 7(-6.05,-3.81)
  rect 8.6x10.55 smd: 8(3.5,0)
  silkscreen extent -6.17,-5.2 -1.2,5.2, body extent -2.6,-5.2 6.29,5.2, height 4.64
TSOP38538 [mm]
  rect 1.6x1.6 hole 1: 1(-2.54,0)
  round 1.6 hole 1: 2(0,0) 3(2.54,0)
  silkscreen extent -4,-2.67 4,1.4
Wurth74438357068 [mm]
  rect 1x3.7 smd: 1(-1.39,0) 2(1.39,0)
  silkscreen extent -2.29,-2.16 2.29,2.16

## Part data
b1 b2 b3 b4 b5 b6 b7 b8: library part Pushbutton, Manufacturer_Part_Number="Wurth 431256083726"
C1: library part Capasitor, Manufacturer_Part_Number=CGB3B1X7R1A105K055AC
C2: library part Capasitor, Manufacturer_Part_Number=CC0603KRX7R9BB103
C3 C4 C6 C7 C11 C12 C13 C16 C17 C18 C21 C22 C23 C26 C27 C28 C29 C30 C31 C32 C33 C35 C36 C37 C38 C39 C40 C41 C42 C43 C44 C45 C46 C47: library part Capasitor, Manufacturer_Part_Number=CC0603KRX7R9BB104
C5 C8 C34: library part Capasitor, Manufacturer_Part_Number=GRM188R61A106ME69D
C9: library part C_SMD_ceramic, "Capacitor", Capacitance=0.1uF, Voltage=50V
C10: library part Capasitor, Manufacturer_Part_Number=C1206C102KGRACTU
C14 C15: library part Capasitor, Manufacturer_Part_Number=C0603C180D5GACTU
C24 C25: library part Capasitor, Manufacturer_Part_Number=C1608X7R1A225M080AC
C48 C52 C56 C60: library part C_SMD_ceramic, "Capacitor", Capacitance=0.01uF, Manufacturer_Part_Number=ECH-U1H103GX5, Voltage=50V
C53 C54 C55 C61 C62 C64 C65 C66 C67 C78 C79 C87 C88 C90 C91: library part C_SMD_ceramic, "Capacitor", Capacitance=0.15uF, Manufacturer_Part_Number=ECP-U1C154MA5, Voltage=50V
C70 C71 C83 C84: library part Capasitor, Manufacturer_Part_Number=C1608X7R1A225K080AC
C72 C76: library part CapPolBarrel, "Конденсатор электролит бочонок 5мм, диаметр 13", Manufacturer_Part_Number=UWT1V221MNL1GS
C73: library part Capasitor, Manufacturer_Part_Number=CGA3E2X7R1H103K080AA
C74 C77 C80 C81 C82: library part C_SMD_ceramic, "Capacitor", Capacitance=10u, Manufacturer_Part_Number=CGA6P3X7S1H106M250AB, Voltage=50V
C75: library part Capasitor, Manufacturer_Part_Number=CGA3E2X7R1H104K080AA
C85 C86: library part Capasitor, Manufacturer_Part_Number=C1608X8R1H473K080AA
D1: library part RG_LED, Manufacturer_Part_Number=APBA3010SURKCGKC-GX
D2 D3 D4: "Zener Voltage Regulator, 500 mW, 2-Pin SOD-123, Pb-Free, Tape and Reel", Manufacturer="On Semiconductor", Supplier Part Number 1=MMSZ4679T1GOSTR-ND, ComponentLink1Description="Manufacturer URL", ComponentLink1URL=http://www.onsemi.com/, ComponentLink2Description=Datasheet, ComponentLink2URL=http://www.onsemi.com/pub_link/Collateral/MMSZ4678T1-D.PDF, ComponentLink3Description="Package Specification", ComponentLink3URL=http://www.onsemi.com/pub_link/Collateral/425-04.PDF, DatasheetVersion="Rev. 9", Manufacturer_Part_Number=MMSZ4679T1G, Mounting Technology="Surface Mount", PackageDescription="2-Pin SOD, Body 1.6 x 2.69 mm", PackageReference=SOD-123-2-425-04, PackageVersion="Rev. G, 10/2009", Packing="Tape and Reel", PartNumber=MMSZ4679T1G, P Max (W)=0.5, RoHS=Pb-Free, Supplier 1=Digi-Key, Supplier 2=Digi-Key, Supplier 3=Digi-Key, Supplier 4=Farnell, Supplier 5=Farnell, Supplier 6=Newark, Supplier 7=Mouser, Supplier Part Number 2=MMSZ4679T1GOSCT-ND, Supplier Part Number 3=MMSZ4679T1GOSDKR-ND, Supplier Part Number 4=1651590, Supplier Part Number 5=1651590RL, Supplier Part Number 6=71J6025, Supplier Part Number 7=863-MMSZ4679T1G, VZ Typ (V)=2
D6 D8 D12 D13 D14 D15: library part 1SMB5.0AT3, "600 W Peak Power Zener Transient Voltage Suppressor, Unidirectional, 2-Pin SMB, Tape and Reel", Manufacturer="On Semiconductor", Supplier Part Number 1=1SMB5.0AT3OSCT-ND, ComponentLink1Description="Manufacturer URL", ComponentLink1URL=http://www.onsemi.com/, ComponentLink2Description=Datasheet, ComponentLink2URL=http://www.onsemi.com/pub_link/Collateral/1SMB5.0AT3-D.PDF, ComponentLink3Description="Package Specification", ComponentLink3URL=http://www.onsemi.com/pub_link/Collateral/1SMB5913BT3-D.PDF, DatasheetVersion="Rev. 13", Direction=Unidirectional, IR Max (uA)=800, Mounting Technology="Surface Mount", PackageDescription="2-Pin Small Molded Package, J-Bend Lead, Body 4.33 x 3.625 mm", PackageReference=SMB-2-403A-03_H, PackageVersion="Rev. H, 05/2011", Packing="Tape and Reel", PartNumber=1SMB5.0AT3, PPK Max (W)=600, Supplier 1=Digi-Key, Supplier 2=Digi-Key, Supplier Part Number 2=1SMB5.0AT3OSDKR-ND, V(BR) Typ (V)=6.7
  D6: Manufacturer_Part_Number=SMLVT3V3
  D8 D13 D15: Manufacturer_Part_Number=SMBJ5.0CA-13-F
  D12 D14: Manufacturer_Part_Number=SMBJ12CA-13-F
D7 D9: "Schottky Rectifier", Manufacturer_Part_Number=10BQ060TR, ComponentLink1Description="Manufacturer Link", ComponentLink1URL=http://www.irf.com/, ComponentLink2Description=Datasheet, ComponentLink2URL=http://www.irf.com/product-info/datasheets/data/10bq60.pdf, DatasheetVersion=PD-2.438A, LatestRevisionDate=17-Jul-2002, LatestRevisionNote="Re-released for DXP Platform.", PackageDescription="DO-214-AA/SMB; 2 C-Bend Leads; Body 5.3 x 3.6 mm, inc. leads (LxW)", PackageReference=SMB, Published=8-Jun-2000, Publisher="Altium Limited"
D10 D11: Manufacturer_Part_Number=DFLS240L-7
DA2: library part REF192GS, "Precision Micropower, Low Dropout Voltage Reference, 2.5 V Output, 2.6 to 15 V Supply, Industrial, 8-pin SOIC (R-8), Tube", Manufacturer_Part_Number=MAX6126BASA41+
DA9 DA11: Manufacturer_Part_Number=MAX5719AGSD+
DA10 DA12: "1.1 nV/rtHz Noise, Low Power, Precision Operational Amplifier, 4.5 to 36 V, -40 to 85 degC, 8-pin SOIC (D8), Green (RoHS & no Sb/Br)", Manufacturer="Texas Instruments", Manufacturer_Part_Number=OPA1611AIDR, Supplier Part Number 1=296-24958-5-ND, Code_JEDEC=MS-012, ComponentLink1Description="Manufacturer URL", ComponentLink1URL=http://www.ti.com/, ComponentLink2Description=Datasheet, ComponentLink2URL=http://www.ti.com/general/docs/lit/getliterature.tsp?genericPartNumber=OPA1611&fileType=pdf, ComponentLink3Description="Package Specification", ComponentLink3URL=http://www.ti.com/litv/pdf/msoi002j, DatasheetVersion=SBOS450B, Eco-Plan="Green (RoHS & no Sb/Br)", GBW(Typ)(MHz)=40, Iq per channel(Max)(mA)=4.5, Mounting Technology="Surface Mount", Number of Channels=1, PackageDescription="8-Pin Plastic Small Outline, Body 4.9 x 3.9 mm, Pitch 1.27 mm", PackageReference=D8, PackageVersion="4040047-3/M, 06/2011", PartNumber=OPA1611AID, SubFamily="Audio Operational Amplifier", Supplier 1=Digi-Key, Supplier 2=Farnell, Supplier 3=Newark, Supplier 4=Mouser, Supplier Part Number 2=1754264, Supplier Part Number 3=50R7815, Supplier Part Number 4=595-OPA1611AID, Vmax(V)=36, Vmin(V)=4.5, Vn at Flatband(Typ)(nV/rtHz)=1.1
DA14: library part LM2676S-3.3, "SIMPLE SWITCHER® High Efficiency 3A Step-Down Voltage Regulator, 7-pin TO-263", Manufacturer="National Semiconductor", PackageTopMarking=NSUZXYTTE#*LM2676*S-3.3, PowerWise=N, Code_JEDEC=MO-169-AC, ComponentLink1Description="Manufacturer URL", ComponentLink1URL=http://www.national.com/, ComponentLink2Description="LM2676 Datasheet", ComponentLink2URL=http://www.national.com/ds/LM/LM2676.pdf, ComponentLink3Description="LM2676 Web Page", ComponentLink3URL=http://www.national.com/pf/LM/LM2676.html, ComponentLink4Description="TS7B Package Page", ComponentLink4URL=http://www.national.com/packaging/folders/ts7b.html, CompType=Switcher, DatasheetVersion=Feb-2008, High-Reliability=Y, Manufacturer_Part_Number=LM2676SX-ADJ, PackageDescription="TO-263, Molded, .400 x .390 x .180in Body, 7 Lead, .050in Pitch, Surface Mount", PackageReference=TS7B, PackageVersion="revE, Jul-2003", PartNumber=LM2676S-3.3, PinCount=7, RoHS=N
DA15: "800mA Low-Dropout Linear Regulator, 3-pin TO-263", Manufacturer="National Semiconductor", Manufacturer_Part_Number=LM1117SX-3.3/NOPB, PackageTopMarking=NSUZXYTTE#*LM1117S*3.3, PowerWise=N, Code_JEDEC=MO-169-AA, ComponentLink1Description="Manufacturer URL", ComponentLink1URL=http://www.national.com/, ComponentLink2Description="LM1117 Datasheet", ComponentLink2URL=http://www.national.com/ds/LM/LM1117.pdf, ComponentLink3Description="LM1117 Web Page", ComponentLink3URL=http://www.national.com/pf/LM/LM1117.html, ComponentLink4Description="TS3B Package Page", ComponentLink4URL=http://www.national.com/packaging/folders/ts3b.html, CompType="LDO IC", DatasheetVersion=Apr-2006, High-Reliability=Y, PackageDescription="TO-263, Molded, .400 x .390 x .180in, 3 Lead, .1in Pitch, Surface Mount", PackageReference=TS3B, PackageVersion="revF, Apr-2005", PartNumber=LM1117SX-3.3, PinCount=3, RoHS=N
DA16: library part ADP5071, Digi-Key P/N=ADP5071AREZ-ND, Manufacturer_Part_Number=ADP5071AREZ, Manufacturer p/n=ADP5071AREZ
DA17: "Positive Voltage Regulator, 3-Pin D2PAK, Tape and Reel", ComponentLink1Description="Manufacturer URL", ComponentLink1URL=http://www.st.com, ComponentLink2Description=Datasheet, ComponentLink2URL=http://www.st.com/internet/com/TECHNICAL_RESOURCES/TECHNICAL_LITERATURE/DATASHEET/CD00000444.pdf, DatasheetVersion=Nov-2011, PackageDescription="3-Pin Transistor Outline Package 2.54 mm Pitch, 15.4 mm Lead Span (D2PAK)", PackageReference=TO-263, PackageVersion=2011, PartNumber=L7805ABD2T-TR
DA18: "Negative Voltage Regulator, -5V, 3-Pin D2PAK, Tape and Reel", ComponentLink1Description="Manufacturer URL", ComponentLink1URL=http://www.st.com, ComponentLink2Description=Datasheet, ComponentLink2URL=http://www.st.com/internet/com/TECHNICAL_RESOURCES/TECHNICAL_LITERATURE/DATASHEET/CD00000450.pdf, DatasheetVersion=Nov-2011, PackageDescription="3-Pin Transistor Outline Package 2.54 mm Pitch, 15.4 mm Lead Span (D2PAK)", PackageReference=TO-263, PackageVersion=2011, PartNumber=L7905CD2T-TR
DD1: library part LAN8720A-CP-TR, "No Description Available", Built_By=EMA_UL_Team, Copyright="Copyright (C) 2018 Accelerated Designs. All rights reserved", Manufacturer_Part_Number=LAN8720A-CP-TR, RefDes=RefDes, Type=DEV, Vendor=Microchip
DD2: "TVS DIODE 3.3V 18V 8SO", Manufacturer_Part_Number=LC03-3.3.TBT
DD3: "Quad Bus Buffer with 3-State Control Inputs", Manufacturer_Part_Number=MC74VHC126DR2G, Code_IPC=SOIC127P600-14, Code_JEDEC=MS-012-AB, ComponentLink1Description="Manufacturer Link", ComponentLink1URL=http://www.onsemi.com/, ComponentLink2Description=Datasheet, ComponentLink2URL=http://www.onsemi.com/pub/Collateral/MC74VHC126-D.PDF, DatasheetVersion=1997, LatestRevisionDate=13-Apr-2006, LatestRevisionNote="IPC-7351 Footprint Added.", PackageDescription="14-Pin Small Outline Integrated Circuit 1.27 mm Pitch", PackageReference=751A-03, Published=15-Apr-2002, Publisher="Altium Limited"
DD4: "3V LVDS Dual CMOS Differential Line Receiver, 8-pin Narrow SOIC", Manufacturer="National Semiconductor", PackageTopMarking=NSZXTT*90LV0*28ATM, PowerWise=N, Code_IPC=SOIC127P600-8, Code_JEDEC=MS-012-AA, ComponentLink1Description="Manufacturer URL", ComponentLink1URL=http://www.national.com/, ComponentLink2Description="DS90LV028A Datasheet", ComponentLink2URL=http://www.national.com/ds/DS/DS90LV028A.pdf, ComponentLink3Description="DS90LV028A Web Page", ComponentLink3URL=http://www.national.com/pf/DS/DS90LV028A.html, ComponentLink4Description="M08A Package Page", ComponentLink4URL=http://www.national.com/packaging/folders/m08a.html, CompType="Interface IC", DatasheetVersion=Aug-2005, High-Reliability=Y, PackageDescription="SOIC Narrow, 4.9 x 3.9 x 1.45mm, 8 Lead, 1.27mm Pitch", PackageReference=M08A, PackageVersion="revM, May-2009", PartNumber=DS90LV028ATM, PinCount=8, RoHS=N
DD5: library part STM32F429ZGT6, "ARM Cortex-M4 32-bit MCU+FPU, 225 DMIPS, 1024 kB Flash, 256 kB Internal RAM, 114 I/Os, 144-pin LQFP, -40 to 85 degC, Tray", I/Os (High Current)=114, Manufacturer=STMicroelectronics, Manufacturer_Part_Number=STM32F429ZIT6, Operating Frequency(F) (Processor speed) (MHz)=180, Supplier Part Number 1=STM32F429ZGT6-ND, Supply Voltage(Vcc) max (V)=3.6, Supply Voltage(Vcc) min (V)=1.8, ComponentLink1Description="Manufacturer URL", ComponentLink1URL=http://www.st.com/web/en/home.html, ComponentLink2Description=Datasheet, ComponentLink2URL=http://www.st.com/st-web-ui/static/active/en/resource/technical/document/data_brief/DM00053488.pdf, ComponentLink3Description="Package Specification", ComponentLink3URL=http://www.st.com/st-web-ui/static/active/en/resource/technical/document/datasheet/DM00037051.pdf, Core="ARM Cortex-M4", D/A Converter=2x12-bit, DatasheetVersion="Rev. 2", FLASH Size (Prog) (kB)=1024, Internal RAM Size (kB)=256, Mounting Technology="Surface Mount", PackageDescription="144-Pin Low Profile Quad Flat Package, 20 x 20 mm Body, 0.5 mm Pitch", PackageReference=LQFP144, PackageVersion="Rev. 4, 06/2013", Packing=Tray, PartNumber=STM32F429ZGT6, PN=STM32F429ZIT6, Supplier 1=Digi-Key, Supplier 2=Newark, Supplier 3=Mouser, Supplier Part Number 2=06X3675, Supplier Part Number 3=511-STM32F429ZGT6
DD6: library part PLR135-T2, Manufacturer_Part_Number=PLR135/T
DD8: library part "MT48LC4M16A2P-6 IT", "64Mb PC133 SDR SDRAM, 4Mb x 16, 6ns, 3.3V, -40C to 85 degC, 54-Pin TSOP, Pb-Free", Manufacturer=Micron, Manufacturer_Part_Number=IS42S16400J, Op. Temp.="-40C to +85C", Voltage=3.3V, CL="CL = 3", Clock Rate="166 MHz", ComponentLink1Description="Manufacturer URL", ComponentLink1URL=http://www.micron.com/, ComponentLink2Description=Datasheet, ComponentLink2URL=http://www.micron.com/~/media/Documents/Products/Data%20Sheet/DRAM/128Mbx16x32Mobile.pdf, ComponentLink3Description="Package Specification", ComponentLink3URL=http://www.micron.com/~/media/Documents/Products/Data%20Sheet/DRAM/128mb_x4x8x16_sdram.pdf, Cycle Time=6ns, Data Rate=PC133, DatasheetVersion=Rev.Q, Density=64Mb, Depth=4Mb, Mounting Technology="Surface Mount", PackageDescription="54-Pin Thin Small Outline Package, 10.16 x 22.22 mm, Pitch 0.8 mm", PackageReference=MICT-P-54, PackageVersion=Rev.Q, PartNumber="MT48LC4M16A2P-6 IT", RoHS=Yes, Width=x16
F1: library part R1206, "Resistor", Manufacturer_Part_Number=NANOSMDH075F-02
L1: library part Inductor_RLF12545, Manufacturer_Part_Number=SRP1265A-330MCT-ND
L2 L3: library part L, Manufacturer_Part_Number="Wurth 74438357068"
R1: library part Resistor, Manufacturer_Part_Number=RC0603FR-071K5L
R2 R4 R17 R50: library part Resistor, Manufacturer_Part_Number=ERJ-3EKF1002V
R3: library part res3296
R5 R6 R7 R8: library part Resistor, Manufacturer_Part_Number=ERJ-3EKF49R9V
R9: library part Resistor, Manufacturer_Part_Number=ERJ-3EKF1212V
R10: library part Resistor, Manufacturer_Part_Number=ERJ-3EKF4990V
R11 R12: library part Resistor, Manufacturer_Part_Number=ERJ-3EKF2700V
R13 R14 R16 R19: library part Resistor, Manufacturer_Part_Number=RC0603FR-07330RL
R15 R18: library part Resistor, Manufacturer_Part_Number=ERJ-3EKF75R0V
R20 R21 R22 R23 R24 R25 R26 R27 R28 R29 R30 R31 R32 R33 R34 R35 R36 R37 R38 R39 R40 R45 R58 R59 R60: library part Resistor, Manufacturer_Part_Number=ERJ-3EKF4701V
R42 R44: library part R_SMD, "Resistor", Manufacturer_Part_Number=ERJ-8ENF1000V, Resistance=100
R47 R56 R57 R61 R62: library part Resistor, Manufacturer_Part_Number=ERJ-PB3B1501V
R48 R55: library part Resistor, Manufacturer_Part_Number=ERJ-3EKF5601V
R49 R54: library part Resistor, Manufacturer_Part_Number=ERJ-3EKF1102V
R51: library part Resistor, Manufacturer_Part_Number=ERJ-3EKF2001V
R52: library part Resistor, Manufacturer_Part_Number=ERJ-3EKF1001V
R53: library part Resistor, Manufacturer_Part_Number=ERJ-3EKF1101V
S1: "8 POLE DIP SWITCH", Manufacturer_Part_Number=206-8
X1: library part "JJ RJLD260TC1 ETH", "CONN MAGJACK 1PORT 100 BASE-TX", Bottom=240, Manufacturer_Part_Number=J00-0065NL, Right=100
X2 X3 X6: library part RCA_connector, Manufacturer_Part_Number=PJRAS1X1S01X
X2: "conn header 6pos vert 75869-131LF", Manufacturer_Part_Number=75869-131LF, LatestRevisionDate=17-Jul-2002, LatestRevisionNote="Re-released for DXP Platform.", Publisher="Altium Limited"
X3: "USB B connector SMT", Manufacturer_Name="Tyco Electronics Amp", C="Copyright (C) 2015 Accelerated Designs. All rights reserved", Copyright="Copyright (C) 2015 Accelerated Designs. All rights reserved", Family=Terminals, Manufacturer_Part_Number=1734346-1, RefDes=RefDes, RS_Part_Number=7187227, Section="General Purpose", Supersection=Connectors, Type=Type, Vendor="Tyco Electronics"
X4: "PJ-102A barrel jack 2.1x5.5x9.0mm"
X5: library part BH-10, "Flat Cable Connector (IDC), Low-Profile Male Header, Straight Solder Pin, 10 Contacts, Performance Level 3", PackageDocument=03-Jun-2003, ComponentLink1Description="Manufacturer Link", ComponentLink1URL=http://www.harting.com/, ComponentLink2Description="Selection Guide", ComponentLink2URL=http://www.harting.com/imperia/md/content/steckverbinderundsystemkomponenten/folder/interface_engl_chapter_09.pdf, DatasheetDocument=Sep-2003, DrillSize="Corresponds to nominal value.", PackageReference=918510x324, PCB_Layout="Complies with manufacturer's recommendation.", Published=15-Nov-2004, Publisher="Altium Limited"
Y1: library part CFPX-5, "Surface Mount Quartz Crystal", PackageDocument=9-Sep-1999, ComponentLink1Description="Manufacturer Link", ComponentLink1URL=http://www.cmac.com/mt/, DatasheetDocument=9-Sep-1999, Manufacturer_Part_Number=ABM8-25.000MHZ-B2-T, Note="PCB layout complies with manufacturer's recommendation.", PackageReference=CFPX-5, Published=17-Jul-2002, Publisher="Altium Limited"
Y2: library part "Oscillator 2.5x2.0", "Oscillator 2.5x2.0", Manufacturer_Part_Number=KC2520B16.3840C1GE00
ZL1: library part BLM31, "FILTER", PN=BLM31PG121SN1L
DD7: Manufacturer_Part_Number=TSOP38538

## Free pads (board coordinates)
  round 6 hole 3.2: Mount(3.429,109.474) Mount(7,62.215) Mount(38.1,18.16) Mount(38.1,38.16) Mount(143.1,18.16) Mount(143.1,38.16) Mount(143.1,58.16) Mount(186.685,62.215) Mount(223.774,37.846)

## Via types
v1: diameter 0.6, hole 0.3, Top Layer to Bottom Layer, 276 vias
v2: diameter 1.27, hole 0.711, Top Layer to Bottom Layer, 47 vias

## Nets (pads, with @x,y where several pads share a name; then routed paths per layer and width w, separated by ;. In a path a pad name is that pad's centre, name@x,y a point inside that pad or via, vN(x,y) a via of type N, cw(c..) or ccw(c..) an arc to the next point about the centre after c; other vN are vias at no path point)
+IntV: C9.2 C70.2 C74.2 C76.2 C81.2 C82.2 D8.1 DA15.3 DA16.17 DA16.18 DA16.19 L1.2 R3.3 R45.2 R48.2 R58.2 X5.2 | length 245.1
  Top Layer w0.35: R58.2@118.618,42.926 v1(120.015,42.926) ; v1@126.701,42.728 126.817,42.612 127.071,42.358 DA16.19@128.443,42.358 ; DA16.18@128.443,43.008 126.817,43.008 126.817,43.658 DA16.17@128.443,43.658
  Top Layer w0.5: v2(2.413,40.894) R45.2@2.413,42.545 ; 16.256,12.065 C70.2@16.256,13.97 ; X5.2@83.312,56.896 83.312,50.673 R3.3@83.566,50.419 ; v1@126.817,42.612 126.817,43.008
  Top Layer w1: v2(109.855,8.382) 122.555,21.082 122.555,24.765 ; C82.2@125.287,24.765 122.555,24.765 ; 126.462,41.686 122.555,37.78 122.555,24.765
  Bottom Layer w0.35: X5.2@83.312,56.896 C9.2@85.852,56.896 ; v1(120.015,42.926) 126.441,42.926 v1(126.69,42.677) ; 126.106,47.122 R48.2@126.106,48.519
  Bottom Layer w0.5: v2(2.413,40.894) 7.239,40.894 v2(25.273,22.86) ; C9.2@85.852,56.639 86.109,56.639 90.424,52.324 90.424,49.612 96.983,43.053 113.411,43.053 114.173,43.815 126.314,43.815 v1(126.69,43.439) 126.69,45.085
  Bottom Layer w1: v2(20.32,11.176) 20.32,8.763 22.098,6.985 28.067,6.985 29.464,8.382 v2(109.855,8.382)
  other v1: 126.69,41.915
+VIN: C72.2 C75.2 D9.2 DA14.2 F1.2 | length 28.9
  Top Layer w0.5: C75.2@16.256,40.462 12.243,40.462 11.938,40.767 DA14.2@11.938,43.134 11.938,50.8 C72.2@14.053,50.8 18.324,50.8 D9.2@21.463,47.661 25.019,47.661 F1.2@25.019,47.649
-8V: C77.2 C78.1 C90.1 D10.1 D14.2 DA18.4 R49.2 | length 82.6
  Top Layer w0.35: v1(122.555,41.275) 122.555,48.423 R49.2@123.464,49.332 ; C77.2@126.687,31.123 C77.2@126.687,30.663 C78.1@126.687,27.869 126.687,21.463 ; D14.2@129.997,21.463 126.687,21.463 ; 161.163,12.065 128.905,12.065 126.687,14.283 126.687,21.463
  Top Layer w0.5: v1(124.206,35.56) 124.842,34.924 D10.1@125.73,34.924 126.687,33.967 C77.2@126.687,31.123 ; 161.163,12.065 166.373,12.065 C90.1@167.132,12.824
  Bottom Layer w0.5: v1(122.555,41.275) 122.555,37.211 v1(124.206,35.56)